# Altium PCB ui_board.PcbDoc
Units mm, origin at the board's own origin, x right, y up, seen from the top; angles counter-clockwise.
Board outline 50 x 49.98 mm, 2 copper layers (Top Layer, Bottom Layer), stack 1.671 mm thick; 44 components, 42 nets, 155 pads, 77 vias.
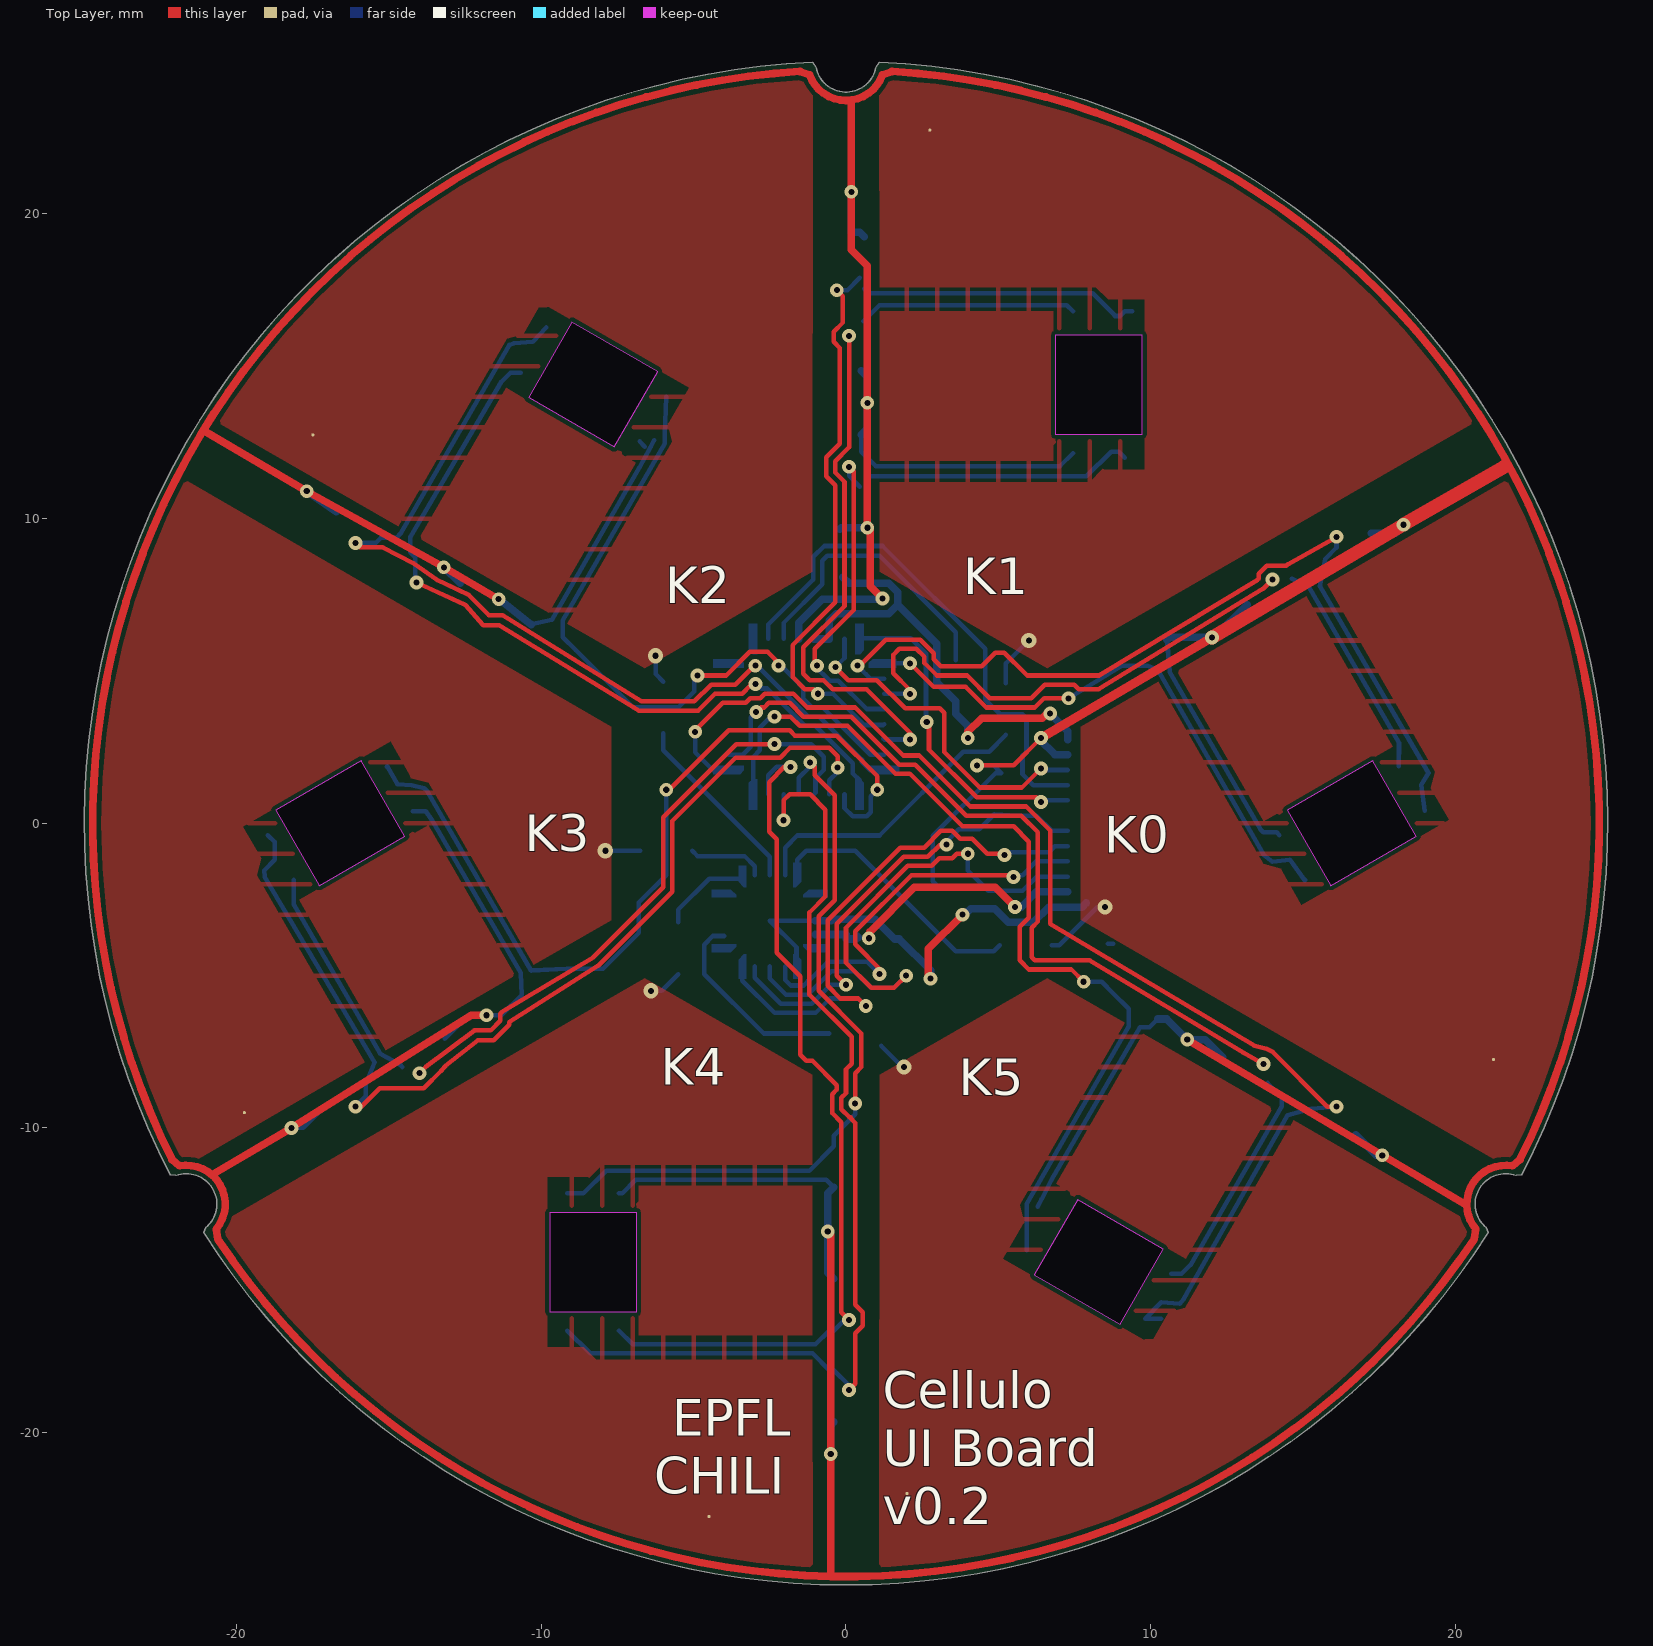
[diagram p0: Top Layer view]
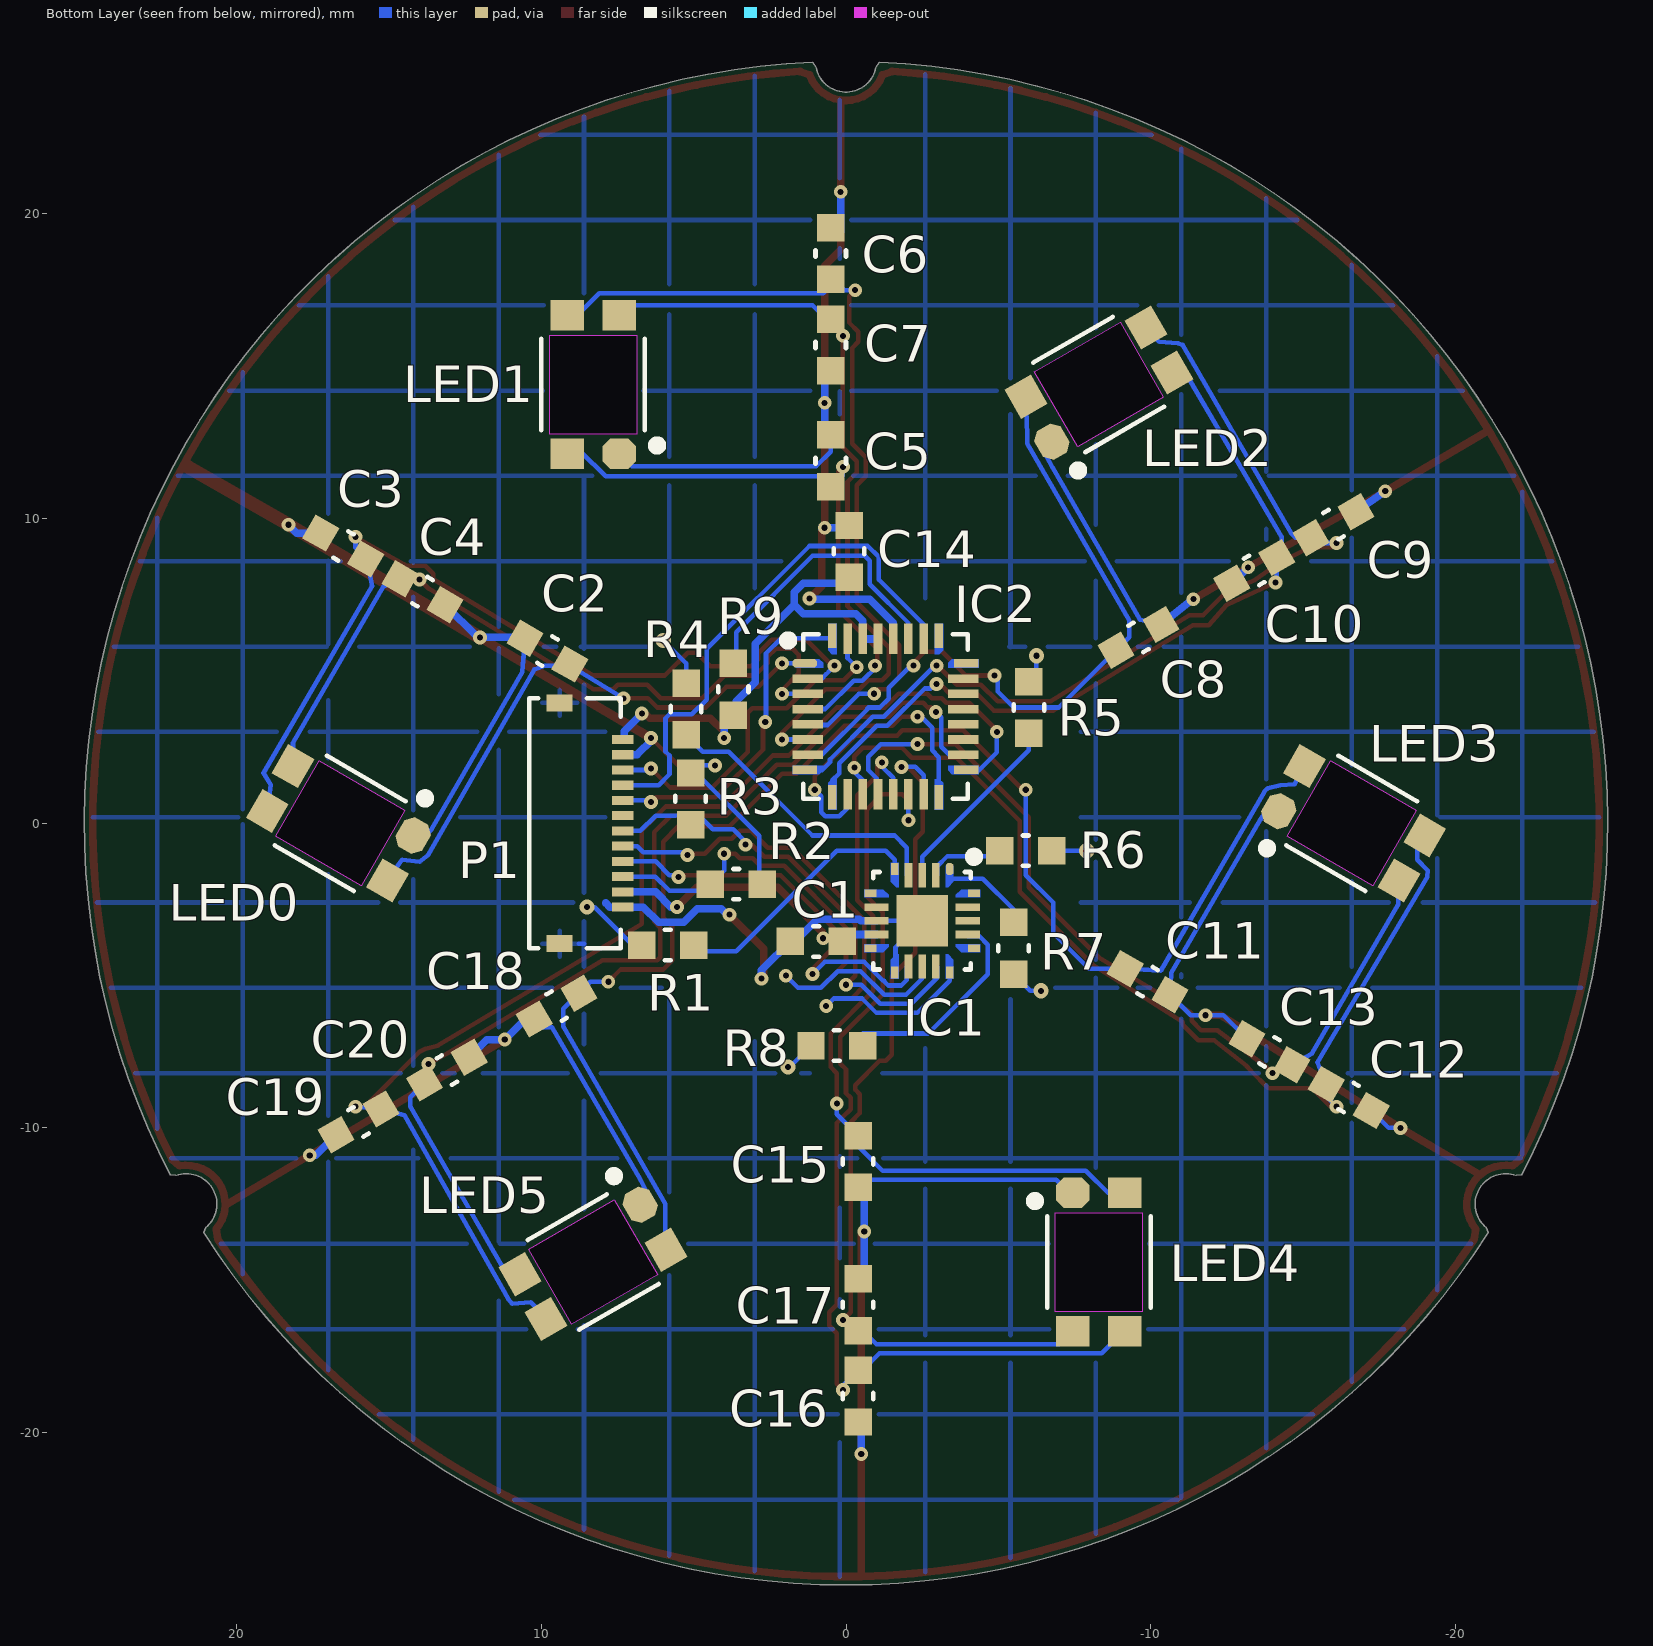
[diagram p1: Bottom Layer view, seen from below]

## Layer stack, top to bottom
Top Layer: signal copper 0.0356
Dielectric: core 1.6, FR-4, Dk 4.8
Bottom Layer: signal copper 0.0356

## Board outline
-21.085,-13.432 -21.008,-13.266 ccw(c-21.651,-12.5) -21.993,-11.56 -22.175,-11.544 cw(c0,0) -1.09,24.976 -0.985,24.826 ccw(c0,25) 0.985,24.826 1.09,24.976 cw(c0,0) 22.175,-11.544 21.993,-11.56 ccw(c21.651,-12.5) 21.008,-13.266 21.085,-13.432 cw(c0,0)

## Design rules (kind name [scope] priority, off if disabled: settings)
Clearance [All] p1: gap=0.15
ComponentClearance [All] p1: gap=0.15 collisioncheckmode=3 verticalgap=0.254 showdistances=FALSE
HoleSize [All] p1: absolutevalues=TRUE maxlimit=99 minlimit=0.2 maxpercent=80.000 minpercent=20.000
HoleToHoleClearance [All] p1: gap=0.15 allowstackedmicrovias=TRUE
MinimumSolderMaskSliver [All] p1: minsoldermaskwidth=0.1
PlaneClearance [All] p1: clearance=0.15
PolygonConnect KeyPadConnect [(InNet('NetK0_1') OR InNet('NetK1_1') OR InNet('NetK2_1') OR InNet('NetK3_1') OR InNet('NetK4_1') OR InNet('NetK5_1'))] p1: connectstyle=Direct reliefconductorwidth=0.254 reliefentries=4 polygonreliefangle="90 Angle" airgapwidth=0.254
PolygonConnect ShieldConnect [InNet('AGND')] p2: connectstyle=Relief reliefconductorwidth=0.15 reliefentries=4 polygonreliefangle="90 Angle" airgapwidth=0.15
PolygonConnect [All] p3: connectstyle=Relief reliefconductorwidth=0.254 reliefentries=4 polygonreliefangle="90 Angle" airgapwidth=0.254
RoutingVias [All] p1: holewidth=0.5 width=0.65 viastyle="Through Hole" minholewidth=0.3 minwidth=0.4 maxholewidth=3 maxwidth=4
ShortCircuit BokCircuit [InComponent('IC1') OR InComponent('IC2')] p1: allowed=TRUE
ShortCircuit [All] p2: allowed=FALSE
SilkToSilkClearance [All] p1: silktosilkclearance=0
SilkToSolderMaskClearance [IsPad] p1: minsilkscreentomaskgap=0.15 clearancetoexposedcopper=TRUE
SolderMaskExpansion [All] p1: expansion=0.102
Width [All] p1: maxlimit=99 minlimit=0.15 preferedwidth=0.15 minimp=50.000000 maximp=50.000000 favimp=50.000000
20 further rules are at their usual default settings.

## Classes and differential pairs
component class Input: C1 IC1 K0 K1 K2 K3 K4 K5 P1 R1 R2 R3 R4 R5 R6 R7 R8
component class Visual: C2 C3 C4 C5 C6 C7 C8 C9 C10 C11 C12 C13 C14 C15 C16 C17 C18 C19 C20 IC2 LED0 LED1 LED2 LED3 LED4 LED5 R9

## Components (designator, comment, footprint, x,y, rotation, side; value= is the part's Value field where it differs from the comment)
C1 "0.1uF" 1608[0603]_M 0.975,-3.875 r180 bottom
C2 "10nF" 1608[0603]_M 9.8,5.65 r30 bottom
C3 "10nF" 1608[0603]_M 16.5,9.1 r30 bottom
C4 "10nF" 1608[0603]_M 13.9,7.6 r210 bottom
C5 "10nF" 1608[0603]_M 0.5,11.9 r90 bottom
C6 "10nF" 1608[0603]_M 0.5,18.7 r90 bottom
C7 "10nF" 1608[0603]_M 0.5,15.7 r270 bottom
C8 "10nF" 1608[0603]_M -9.6,6.1 r150 bottom
C9 "10nF" 1608[0603]_M -16,9.8 r150 bottom
C10 "10nF" 1608[0603]_M -13.4,8.3 r330 bottom
C11 "10nF" 1608[0603]_M -9.9,-5.2 r210 bottom
C12 "10nF" 1608[0603]_M -16.5,-9 r210 bottom
C13 "10nF" 1608[0603]_M -13.9,-7.5 r30 bottom
C14 "0.1uF" 1608[0603]_M -0.1,8.925 r90 bottom
C15 "10nF" 1608[0603]_M -0.4,-11.1 r270 bottom
C16 "10nF" 1608[0603]_M -0.4,-18.8 r270 bottom
C17 "10nF" 1608[0603]_M -0.4,-15.8 r90 bottom
C18 "10nF" 1608[0603]_M 9.5,-6 r330 bottom
C19 "10nF" 1608[0603]_M 16,-9.8 r330 bottom
C20 "10nF" 1608[0603]_M 13.1,-8.1 r150 bottom
IC1 "AT42QT1070-MMH" VQFN-20-EXPOSED-PAD_M -2.5,-3.2 r90 bottom
IC2 "TLC5947" VQFN-32_M -1.3,3.5 r0 bottom
K0 "SELF-CAP-TOUCH-SENSOR-PAD" TOUCH_SENSOR_SEED 21.25,-7.75 r90 top
K1 "SELF-CAP-TOUCH-SENSOR-PAD" TOUCH_SENSOR_SEED 2.75,22.75 r0 top
K2 "SELF-CAP-TOUCH-SENSOR-PAD" TOUCH_SENSOR_SEED -17.5,12.75 r90 top
K3 "SELF-CAP-TOUCH-SENSOR-PAD" TOUCH_SENSOR_SEED -19.75,-9.5 r90 top
K4 "SELF-CAP-TOUCH-SENSOR-PAD" TOUCH_SENSOR_SEED -4.5,-22.75 r90 top
K5 "SELF-CAP-TOUCH-SENSOR-PAD" TOUCH_SENSOR_SEED 2,-22 r90 top
LED0 "ASMB-MTB0-0A3A2 reverse mount as through hole" PLCC4-REVERSE-MOUNT_N 16.6,0 r210 bottom
LED1 "ASMB-MTB0-0A3A2 reverse mount as through hole" PLCC4-REVERSE-MOUNT_N 8.3,14.4 r270 bottom
LED2 "ASMB-MTB0-0A3A2 reverse mount as through hole" PLCC4-REVERSE-MOUNT_N -8.3,14.4 r330 bottom
LED3 "ASMB-MTB0-0A3A2 reverse mount as through hole" PLCC4-REVERSE-MOUNT_N -16.6,0 r30 bottom
LED4 "ASMB-MTB0-0A3A2 reverse mount as through hole" PLCC4-REVERSE-MOUNT_N -8.3,-14.4 r90 bottom
LED5 "ASMB-MTB0-0A3A2 reverse mount as through hole" PLCC4-REVERSE-MOUNT_N 8.3,-14.4 r150 bottom
P1 "Connector 12" FH33-12S-0.5SH_N 8,0 r270 bottom
R1 "4K7" 1608[0603]_M 5.85,-4 r180 bottom
R2 "47K" 1608[0603]_M 3.6,-2 r180 bottom
R3 "47K" 1608[0603]_M 5.1,0.8 r90 bottom
R4 "4K7" 1608[0603]_M 5.25,3.75 r270 bottom
R5 "4K7" 1608[0603]_M -6,3.8 r270 bottom
R6 "4K7" 1608[0603]_M -5.9,-0.9 r0 bottom
R7 "4K7" 1608[0603]_M -5.5,-4.1 r90 bottom
R8 "4K7" 1608[0603]_M 0.3,-7.3 r180 bottom
R9 "4K99" 1608[0603]_M 3.7,4.4 r90 bottom

## Footprints (in the part's own frame and the unit in brackets; to place one, negate y for a bottom-side part, rotate by r counter-clockwise, add the part's x,y. Pads: shape width x height; smd on the part's side, far side on the other; paste and mask are expansions set on the pad)
1608[0603]_M [mm] "Two Terminal Package, Body 1.6x0.8mm, IPC Low Density"
  rect 0.9x0.9 smd: 1(-0.85,0) 2(0.85,0)
  silkscreen extent -0.1,-0.5 0.1,0.5, body extent -0.8,-0.4 0.8,0.4, height 0.85
FH33-12S-0.5SH_N [mm] "Flax flexible cable connector, 12-Leads, 0.5mm Pitch, Side entry, IPC medium density"
  rect 0.3x0.7 smd paste-0.025 mask+0.049: 1(-2.75,0.675) 2(-2.25,0.675) 3(-1.75,0.675) 4(-1.25,0.675) 5(-0.75,0.675) 6(-0.25,0.675) 7(0.25,0.675) 8(0.75,0.675) 9(1.25,0.675) 10(1.75,0.675) 11(2.25,0.675) 12(2.75,0.675)
  rect 0.55x0.85 smd: Mechanical1(-3.95,-1.4) Mechanical2(3.95,-1.4)
  silkscreen extent -4.1,-2.4 4.1,0.6, body extent -4.08,-2.35 4.07,0.5, height 1.3
PLCC4-REVERSE-MOUNT_N [mm] "PLCC reverse mount, 4-Leads, Body 3.2x2.8mm, 1.7mm pitch, Lead Span 5.4mm, IPC Medium Density"
  oct 1x1.1 smd: 1(2.275,0.85)
  rect 1x1.1 smd: 2(-2.275,0.85) 3(-2.275,-0.85) 4(2.275,-0.85)
  Keep-Out Layer board cut-out: -1.625,-1.425 -1.625,1.425 1.625,1.425 1.625,-1.425
  Keep-Out Layer region: -1.625,-1.425 -1.625,1.425 1.625,1.425 1.625,-1.425
  silkscreen extent -1.5,-1.7 2.15,2.25, body extent -2.7,-1.4 2.7,1.4, height 1.1
TOUCH_SENSOR_SEED [mm] "Self-capacitive touch sensor pad seed"
  round 0.1 smd paste-0.05 mask-0.05: 1(0,0)
VQFN-20-EXPOSED-PAD_M [mm] "VQFN, 20-Leads, Body 3x3mm, Pitch 0.45mm, IPC Low Density"
  oct 0.4x0.25 smd paste-0.025 mask+0.05: 1(1.7,-0.9)
  rect 0.8x0.25 smd paste-0.025 mask+0.05: 2(1.5,-0.45) 3(1.5,0) 4(1.5,0.45) 12(-1.5,0.45) 13(-1.5,0) 14(-1.5,-0.45)
  rect 0.4x0.25 smd paste-0.85 mask+0.05: 5(1.7,0.9) 11(-1.7,0.9) 15(-1.7,-0.9)
  rect 0.25x0.4 smd paste-0.85 mask+0.05: 6(0.9,1.7) 10(-0.9,1.7) 16(-0.9,-1.7) 20(0.9,-1.7)
  rect 0.25x0.8 smd paste-0.025 mask+0.05: 7(0.45,1.5) 8(0,1.5) 9(-0.45,1.5) 17(-0.45,-1.5) 18(0,-1.5) 19(0.45,-1.5)
  rect 1.7x1.7 smd mask+0.05: EP(0,0)
  Top Layer region: -1.9,-0.775 -1.1,-0.775 -1.1,-0.85 -1.275,-1.025 -1.9,-1.025
  Top Layer region: -0.775,-1.9 -0.775,-1.1 -0.85,-1.1 -1.025,-1.275 -1.025,-1.9
  Top Layer region: 1.8,-0.775 1.1,-0.775 1.1,-0.85 1.275,-1.025 1.8,-1.025
  Top Layer region: 0.775,-1.9 0.775,-1.1 0.85,-1.1 1.025,-1.275 1.025,-1.9
  Top Layer region: 0.775,1.9 0.775,1.1 0.85,1.1 1.025,1.275 1.025,1.9
  Top Layer region: 1.9,0.775 1.1,0.775 1.1,0.85 1.275,1.025 1.9,1.025
  Top Layer region: -1.9,0.775 -1.1,0.775 -1.1,0.85 -1.275,1.025 -1.9,1.025
  Top Layer region: -0.775,1.9 -0.775,1.1 -0.85,1.1 -1.025,1.275 -1.025,1.9
  silkscreen extent -1.6,-1.85 2.25,1.6, body extent -1.55,-1.55 1.55,1.55, height 0.85
VQFN-32_M [mm] "VQFN, 32-Leads, Body 5x5mm, Pitch 0.5mm, IPC Low Density"
  oct 0.8x0.28 smd paste-0.025 mask+0.05: 1(2.65,-1.75)
  rect 1x0.28 smd paste-0.025 mask+0.05: 2(2.55,-1.25) 3(2.55,-0.75) 4(2.55,-0.25) 5(2.55,0.25) 6(2.55,0.75) 7(2.55,1.25) 18(-2.55,1.25) 19(-2.55,0.75) 20(-2.55,0.25) 21(-2.55,-0.25) 22(-2.55,-0.75) 23(-2.55,-1.25)
  rect 0.8x0.28 smd paste-0.4 mask+0.05: 8(2.65,1.75) 17(-2.65,1.75) 24(-2.65,-1.75)
  rect 0.28x0.8 smd paste-0.4 mask+0.05: 9(1.75,2.65) 16(-1.75,2.65) 25(-1.75,-2.65) 32(1.75,-2.65)
  rect 0.28x1 smd paste-0.025 mask+0.05: 10(1.25,2.55) 11(0.75,2.55) 12(0.25,2.55) 13(-0.25,2.55) 14(-0.75,2.55) 15(-1.25,2.55) 26(-1.25,-2.55) 27(-0.75,-2.55) 28(-0.25,-2.55) 29(0.25,-2.55) 30(0.75,-2.55) 31(1.25,-2.55)
  Top Layer region: -1.61,-3.05 -1.61,-2.05 -1.765,-2.05 -1.89,-2.175 -1.89,-3.05
  Top Layer region: -3.05,-1.61 -2.05,-1.61 -2.05,-1.765 -2.175,-1.89 -3.05,-1.89
  Top Layer region: 1.61,-3.05 1.61,-2.05 1.765,-2.05 1.89,-2.175 1.89,-3.05
  Top Layer region: 2.95,-1.61 2.05,-1.61 2.05,-1.765 2.175,-1.89 2.95,-1.89
  Top Layer region: 3.05,1.61 2.05,1.61 2.05,1.765 2.175,1.89 3.05,1.89
  Top Layer region: 1.61,3.05 1.61,2.05 1.765,2.05 1.89,2.175 1.89,3.05
  Top Layer region: -1.61,3.05 -1.61,2.05 -1.765,2.05 -1.89,2.175 -1.89,3.05
  Top Layer region: -3.05,1.61 -2.05,1.61 -2.05,1.765 -2.175,1.89 -3.05,1.89
  silkscreen extent -2.7,-2.7 3.35,2.7, body extent -2.58,-2.58 2.58,2.58, height 1

## Part data
C1 C2 C3 C4 C5 C6 C7 C8 C9 C10 C11 C12 C13 C14 C15 C16 C17 C18 C19 C20: library part Capacitor, "Generic Capacitor"
IC1: library part AT42QT1070, "Seven-channel capacitive touch sensor (Comms mode)"
IC2: "24-Channel, 12-Bit PWM LED Driver With Internal Oscillator"
K0 K1 K2 K3 K4 K5: "Generic self-capacitance touch sensor pad"
LED0 LED1 LED2 LED3 LED4 LED5: library part RGB-LED-COMMON-ANODE, "Generic RGB LED with common anode"
P1: "Connector 12-Pin"
R1 R2 R3 R4 R5 R6 R7 R8 R9: library part Resistor, "Generic Resistor"

## Via types
v1: diameter 0.45, hole 0.2, Top Layer to Bottom Layer, 46 vias
v2: diameter 0.45, hole 0.2, Top Layer to Bottom Layer, tented both sides, 14 vias
v3: diameter 0.45, hole 0.2, Top Layer to Bottom Layer, tented bottom, 10 vias
v4: diameter 0.5, hole 0.2, Top Layer to Bottom Layer, tented both sides, 6 vias
v5: diameter 0.45, hole 0.2, Top Layer to Bottom Layer, tented top, 1 vias

## Nets (pads, with @x,y where several pads share a name; then routed paths per layer and width w, separated by ;. In a path a pad name is that pad's centre, name@x,y a point inside that pad or via, vN(x,y) a via of type N, cw(c..) or ccw(c..) an arc to the next point about the centre after c; other vN are vias at no path point)
3V3: C2.2 C3.2 C4.2 C5.2 C6.2 C7.2 C8.2 C9.2 C10.2 C11.2 C12.2 C13.2 C14.2 C15.2 C16.2 C17.2 C18.2 C19.2 C20.2 IC2.28 LED0.1 LED1.1 LED2.1 LED3.1 LED4.1 LED5.1 P1.2 R2.2 R3.2 | length 319.1
  Top Layer w0.15: v1(4.3,1.9) 5.5,1.9 v1(6.4,2.8)
  Top Layer w0.25: -22.127,-11.032 -21.872,-11.244 cw(c-21.651,-12.5) -20.674,-13.32 -20.618,-13.647 ; -21.086,12.892 v3(-17.7,10.9) v3(-13.2,8.4) v3(-11.4,7.358) ; -20.809,-11.534 v3(-18.2,-10) -12.3,-6.3 v3(-11.8,-6.3) ; -1.509,24.679 -1.198,24.564 ccw(c0,25) 1.198,24.564 1.509,24.679 ; v1(-0.6,-13.4) -0.5,-13.5 v3(-0.5,-20.7) -0.5,-24.727 ; 0.175,23.7 0.175,18.825 0.7,18.3 v1(0.7,9.7) 0.8,9.7 0.8,7.775 v1(1.2,7.375) ; v1(11.2,-7.1) 17.605,-10.892 20.376,-12.532 ; 20.674,-13.32 cw(c21.651,-12.5) 20.376,-12.532 ; 22.127,-11.032 21.872,-11.244 ccw(c21.651,-12.5) 20.376,-12.532
  Top Layer w0.254: -22.127,-11.032 cw(c0,0) -1.509,24.679 ; -20.618,-13.647 ccw(c0,0) -0.5,-24.72 ccw(c0,0) 20.618,-13.647 20.674,-13.32 ; 1.509,24.679 cw(c0,0) 22.127,-11.032
  Top Layer w0.3: v1(6.4,2.8) v1(12.01,6.1)
  Top Layer w0.45: v1(12.01,6.1) v1(18.3,9.8) 21.6,11.7
  Bottom Layer w0.15: v3(-18.2,-10) -17.811,-10 C12.2 ; LED3.1@-14.226,0.389 -13.789,0.389 -13.6,0.125 -10.675,-4.925 C11.2 -11.311,-6.3 v3(-11.8,-6.3) -12.389,-6.3 C13.2 ; C8.2 -9.65,6.675 -6.771,11.679 -6.417,12.347 LED2.1@-6.297,12.572 ; LED4.1@-7.45,-12.15 -7.35,-12.15 -6.9,-11.7 -0.65,-11.7 C15.2 ; LED2.1@-6.776,12.539 LED2.1@-6.6,12.362 ; C5.2 0.5,12.2 0.975,11.725 7.025,11.725 LED1.1@7.45,12.15 ; R2.2@2.95,-2 2.85,-1.9 2.85,-0.414 4.914,1.65 R3.2 4.85,1.9 v1(4.3,1.9) ; LED5.1@6.287,-12.587 6.412,-12.347 6.75,-11.702 9.65,-6.7 9.961,-6.7 C18.2 ; C2.2@10.536,6.025 10.625,4.975 13.6,-0.2 13.7,-0.3 14.138,-0.3 LED0.1@14.226,-0.389
  Bottom Layer w0.25: v3(-17.7,10.9) C9.2 ; v3(-13.2,8.4) C10.2 ; v3@-11.3,7.3 C8.2 ; IC2.28 -1.55,6.579 -0.779,7.35 1.175,7.35 v1(1.2,7.375) ; v3(-0.5,-20.7) -0.5,-19.75 C16.2 ; C17.2 -0.6,-14.75 v1(-0.6,-13.4) -0.6,-12.15 C15.2 ; C14.2@-0.2,9.65 -0.15,9.7 0.8,9.7 v1(0.7,9.7) ; v1(0.175,20.725) 0.175,19.4 0.45,19.4 C6.2@0.6,19.25 ; C5.2 0.7,12.95 v1(0.7,13.8) 0.7,14.65 C7.2 ; v1@6.35,2.761 6.861,2.25 P1.2@7.275,2.25 ; C18.2 10.525,-6.425 v1(11.2,-7.1) 11.789,-7.1 C20.2 ; C2.2@10.536,6.025 10.611,6.1 v1(12.01,6.1) 12.089,6.1 C4.2 ; C19.2 17.411,-10.9 v1(17.6,-10.9) ; C3.2 18.025,9.525 v1(18.3,9.8)
A3V3: C1.2 IC1.9 P1.11 | length 9.1
  Top Layer w0.25: v1(0.75,-3.775) v1@0.775,-3.775 ; v1@0.775,-3.575 0.775,-3.569 2.244,-2.1 4.9,-2.1 v1(5.55,-2.75)
  Bottom Layer w0.25: IC1.9 C1.2@0,-3.65 ; C1.2@0.015,-3.8 C1.2@0.325,-3.8 ; C1.2@0.35,-3.7 C1.2@0.4,-3.75 ; v1(0.75,-3.775) v1@0.775,-3.775 ; v1@5.45,-2.75 5.75,-2.75 6.25,-2.25 P1.11@7.275,-2.25
AGND: C1.1 IC1.8 IC1.11 IC1.EP P1.12 P1.Mechanical1 P1.Mechanical2 | length 15.7
  Top Layer w0.25: v1(2.775,-5.1) 2.7,-5.025 2.7,-4.125 v1(3.825,-3)
  Bottom Layer w0.15: IC1.11 -1.625,-4.875 -1.625,-4.075 IC1.EP IC1.8 ; 8.6,-3.95 8.775,-3.95
  Bottom Layer w0.25: IC1.8 -0.489,-3.2 -0.439,-3.15 0.95,-3.15 1.6,-3.8 1.75,-3.8 2.775,-4.825 v1(2.775,-5.1) ; v1@3.825,-3.075 4.1,-2.8 4.875,-2.8 5.325,-3.25 6.15,-3.25 6.65,-2.75 P1.12@7.275,-2.75 ; P1.12 7.755,-2.75 7.89,-2.615
GND: C14.1 IC2.29 IC2.30 P1.1 R9.1 | length 15.5
  Top Layer w0.25: v1(4,2.8) 4,3 4.453,3.453 4.455,3.45 6.446,3.45 v1@6.648,3.652
  Bottom Layer w0.25: IC2.29 IC2.30 -0.55,6.65 -0.325,6.875 1.407,6.875 1.7,7.168 ; C14.1 0.1,7.875 1.407,7.875 1.7,7.582 1.7,7.168 ; v1(4,2.8) 4,3.2 3.6,3.6 3.6,4 2.975,4.625 2.975,5.893 1.7,7.168 ; v1(6.7,3.6) 7.275,3.025 P1.1@7.275,2.75
LED1_BLUE: C4.1 IC2.3 LED0.2 | length 24.3
  Top Layer w0.15: v1(2.1,4.25) 2.1,4.375 1.55,4.925 1.55,5.525 1.75,5.725 2.311,5.725 2.575,5.462 2.575,5.261 2.986,4.85 3.974,4.85 4.724,4.1 6.076,4.1 6.526,4.55 7.486,4.55 7.636,4.4 8.3,4.4 13.7,7.7 v1(14,8)
  Bottom Layer w0.15: IC2.3 v1(2.1,4.25) ; C4.1 15.175,7.775 18.15,2.65 LED0.2
LED1_GREEN: C3.1 IC2.2 LED0.3 | length 29.7
  Top Layer w0.15: v2(0.375,5.175) 0.45,5.175 1.3,6.025 2.436,6.025 2.875,5.586 2.875,5.386 3.111,5.15 4.45,5.15 4.9,5.6 5.2,5.6 5.9,4.9 5.95,4.85 8.304,4.85 13.506,7.99 ; 13.55,8.028 13.55,8.186 13.814,8.45 14.45,8.45 14.5,8.5 v1(16.1,9.4)
  Bottom Layer w0.15: v2(0.375,5.175) 0.525,5.025 0.525,5.017 0.657,4.885 0.665,4.885 0.8,4.75 IC2.2 ; v1(16.1,9.4) 16.1,9.05 15.725,8.675 15.55,7.775 18.495,2.717 19.125,1.65 18.875,1.25 LED0.3@18.994,0.41
LED1_RED: C2.1 IC2.1 LED0.4 | length 18.7
  Top Layer w0.15: v1(2.1,5.25) 2.875,4.475 3.925,4.475 4.6,3.8 6.2,3.8 6.5,4.1 v1(7.3,4.1)
  Bottom Layer w0.15: IC2.1 v1(2.1,5.25) ; v1(7.3,4.1) 9.064,5.175 9.897,5.175 10.23,5.05 13.725,-1.05 13.995,-1.263 14.571,-1.196 LED0.4@15.046,-1.861 ; LED0.4 LED0.4@15.046,-1.861 ; LED0.4@15.076,-1.861 LED0.4@15.046,-1.861
LED2_BLUE: C7.1 IC2.6 LED1.2 | length 24.5
  Top Layer w0.15: v1(0.1,16) 0.1,12.336 -0.35,11.886 -0.35,11.514 -0.05,11.214 -0.05,7.126 -1.4,5.776 -1.4,4.914 -1.186,4.7 -1.112,4.7 -0.739,4.7 -0.439,4.4 0.675,4.4 2.1,2.975 v1(2.1,2.75)
  Bottom Layer w0.15: C7.1@0.575,16.475 1.1,17 7.25,17 LED1.2@7.45,16.8 ; IC2.6@1.225,2.775 IC2.6 v1(2.1,2.75)
LED2_GREEN: C6.1 IC2.5 LED1.3 | length 27.7
  Top Layer w0.15: v2(-0.925,4.25) -1.075,4.4 -1.35,4.4 -1.75,4.8 -1.75,5.85 -0.35,7.25 -0.35,11.089 -0.65,11.389 -0.65,12.011 -0.2,12.461 -0.2,15.6 -0.4,15.8 -0.4,16.136 -0.1,16.436 -0.1,17.3 v1(-0.3,17.5)
  Bottom Layer w0.15: v2(-0.925,4.25) -0.425,4.25 0.6,3.225 1.225,3.225 IC2.5 ; v1(-0.3,17.5) 0.05,17.5 C6.1@0.45,17.9 ; C6.1@0.6,17.55 0.75,17.4 8.1,17.4 LED1.3@8.825,16.675 ; LED1.3@8.818,16.65 9,16.65 9.15,16.8 LED1.3@9.4,16.8
LED2_RED: C5.1 IC2.4 LED1.4 | length 19.8
  Top Layer w0.15: v2@-1.025,5.15 -1.025,5.726 0.25,7.001 0.25,11.55 v1(0.1,11.7)
  Bottom Layer w0.15: v2@-1.025,5.175 -1,5.15 -0.97,5.181 -0.956,5.181 v2(-0.95,5.175) ; v2@-1.025,5.222 -1.025,5.164 -0.536,4.675 -0.25,4.675 0.675,3.75 IC2.4 ; v1@0.1,11.8 v1(0.1,11.7) 0.1,11.4 C5.1@0.45,11.05 ; C5.1@0.788,11.387 7.887,11.387 8.7,12.2 8.95,12.2 LED1.4@9.15,12
LED3_BLUE: C10.1 IC2.9 LED2.2 | length 26.4
  Top Layer w0.15: v3(-14.1,7.9) -12.5,7.175 -11.9,6.5 -11.395,6.505 ; -11.395,6.504 -6.8,3.7 -4.85,3.7 -4.3,4.25 -3.411,4.25 -3.136,4.525 v2@-3.025,4.525
  Bottom Layer w0.15: v3(-14.1,7.9) -14.136,7.936 C10.1 -14.3,8.889 -14.3,9.4 -11.3,14.5 -11.011,14.789 LED2.2@-10.674,14.789 ; v2(-2.972,4.575) -2.925,4.575 -2.775,4.425 -2.585,4.425 -1.36,3.2 -1.007,3.2 0.225,1.968 0.225,1.633 0.45,1.408 IC2.9
LED3_GREEN: C9.1 IC2.8 LED2.3 | length 31.1
  Top Layer w0.15: v3(-16.1,9.2) -15.954,9.054 -15.2,9.054 -14.188,8.529 -13.418,7.982 -12.389,7.5 -11.723,6.834 -11.279,6.834 -6.7,4 -4.975,4 -4.425,4.55 -3.634,4.55 -3.009,5.175 v2(-2.975,5.175)
  Bottom Layer w0.15: v3(-16.1,9.2) -15.439,9.2 C9.1 -14.753,9.375 -14.628,9.5 -11.05,15.7 -10.9,15.753 -10.275,15.8 LED2.3 ; v2(-2.975,5.175) -2.91,5.175 -1.236,3.5 -0.883,3.5 0.525,2.093 0.525,2 0.775,1.75 IC2.8
LED3_RED: C8.1 IC2.7 LED2.4 | length 23.1
  Top Layer w0.15: v1(-4.875,4.85) -3.936,4.85 -3.161,5.625 -2.575,5.625 -2.125,5.175 v2(-2.214,5.175)
  Bottom Layer w0.15: LED2.4 -5.947,12.75 -5.947,12.475 -9.304,6.654 -9.3,6.111 C8.1 -6.989,3.8 -5.5,3.8 -4.975,4.325 -4.975,4.75 v1(-4.875,4.85) ; v2(-2.214,5.175) -2.125,5.175 -1.4,4.45 -1.4,4.089 -1.111,3.8 -0.739,3.8 -0.707,3.768 -0.707,3.749 0.792,2.25 IC2.7
LED4_BLUE: C13.1 IC2.12 LED3.2 | length 27.7
  Top Layer w0.15: v3(-14,-8.2) -13.8,-8 -12.2,-6.8 -11.664,-6.8 -11.35,-6.486 -11.35,-6.25 -11.3,-6.2 -8.3,-4.4 -6,-2.1 -6,0.2 -3.6,2.6 v2(-2.35,2.6)
  Bottom Layer w0.15: LED3.2@-18.124,-1.861 -18.124,-2.676 -15.298,-7.55 C13.1 C13.1@-14.561,-8 ; v2(-2.35,2.6) -1.139,2.6 -0.725,2.186 -0.725,1.814 -0.725,1.75 -1,1.475 -1,1 IC2.12
LED4_GREEN: C12.1 IC2.11 LED3.3 | length 33.6
  Top Layer w0.15: v3(-16.1,-9.3) -15.909,-9.3 -15.309,-8.7 -13.864,-8.7 -13.277,-8.113 -13.277,-8.1 -13.138,-7.962 -12.081,-7.119 -11.558,-7.119 -11.05,-6.611 -11.05,-6.528 -8.127,-4.673 -5.7,-2.247 -5.7,0.076 -3.626,2.15 -2.164,2.15 -1.839,2.475 -0.55,2.475 -0.275,2.2 v2(-0.275,1.825)
  Bottom Layer w0.15: LED3.3@-18.974,-0.389 -18.75,-0.612 -18.75,-1.2 -19.1,-1.55 -19.078,-1.75 -15.476,-7.85 C12.1 -15.764,-8.964 v3(-16.1,-9.3) ; IC2.11 -0.55,1.408 -0.275,1.683 v2(-0.275,1.825)
LED4_RED: C11.1 IC2.10 LED3.4 | length 28.8
  Top Layer w0.15: v1(-5.9,1.1) -5.8,1.1 -3.85,3.05 -1.851,3.05 -1.676,2.875 -0.3,2.875 1.025,1.55 v2(1.025,1.1)
  Bottom Layer w0.15: LED3.4@-15.076,1.861 LED3.4@-15.048,1.861 ; LED3.4 LED3.4@-15.048,1.861 ; v1@-5.9,1.125 v1(-5.9,1.1) -5.9,-1.7 -6.8,-2.6 -6.8,-3.6 -7.975,-4.775 C11.1 -10.332,-4.831 -13.734,1.041 -13.846,1.154 -14.25,1.25 -14.725,1.275 LED3.4@-15.048,1.861 ; IC2.10 -0.05,0.492 0.217,0.225 0.683,0.225 0.815,0.357 0.815,0.89 v2(1.025,1.1)
LED5_BLUE: C17.1 IC2.15 LED4.2 | length 29.5
  Top Layer w0.15: v2(-1.825,1.85) -2.025,1.85 -2.525,1.35 -2.525,-0.275 -2.275,-0.525 -2.275,-4.25 -1.5,-5.025 -1.5,-7.6 -1.3,-7.8 -1.1,-7.8 -0.3,-8.6 -0.3,-8.739 -0.45,-8.889 -0.45,-9.511 -0.15,-9.811 -0.15,-16.05 v1(0.1,-16.3)
  Bottom Layer w0.15: LED4.2@-7.45,-16.65 -7,-17.1 -1,-17.1 -0.55,-16.65 C17.1 v1@0.1,-16.15 ; IC2.15 -2.55,1.575 -2.275,1.85 v2(-1.825,1.85)
LED5_GREEN: C16.1 IC2.14 LED4.3 | length 33.8
  Top Layer w0.15: v1(-2.05,0.1) -2.05,0.75 -1.85,0.95 -1.175,0.95 -0.675,0.45 -0.675,-2.403 -1.2,-2.928 -1.2,-5.624 0.188,-7.012 0.188,-7.888 0,-8.076 0,-8.864 -0.15,-9.014 -0.15,-9.386 0.114,-9.65 0.15,-9.65 0.15,-9.686 0.3,-9.836 0.3,-15.8 0.55,-16.05 0.55,-16.486 0.3,-16.736 0.3,-18.4 v1(0.1,-18.6)
  Bottom Layer w0.15: LED4.3@-9.15,-16.65 -8.4,-17.4 -1.1,-17.4 -0.55,-17.95 C16.1 0.1,-18.45 v1(0.1,-18.6) ; v1(-2.05,0.1) IC2.14
LED5_RED: C15.1 IC2.13 LED4.4 | length 24.7
  Top Layer w0.15: v2(-1.175,2) -1.025,1.85 -1.025,1.575 -0.375,0.925 -0.375,-2.527 -0.9,-3.052 -0.9,-5.5 0.5,-6.9 0.5,-8 0.3,-8.2 v1(0.3,-9.2)
  Bottom Layer w0.15: LED4.4@-9.15,-12.15 -8.625,-12.15 -7.875,-11.4 -1.2,-11.4 -0.4,-10.6 C15.1 0.3,-9.55 v1(0.3,-9.2) ; IC2.13 -1.55,1.489 -1.175,1.864 v2(-1.175,2)
LED6_BLUE: C20.1 IC2.18 LED5.2 | length 33.5
  Top Layer w0.15: v2@-2.875,3.725 -2.8,3.8 -2.687,3.8 -2.537,3.95 -1.849,3.95 -1.399,3.5 0.174,3.5 1.749,1.925 2.275,1.925 3.95,0.25 5.75,0.25 6.3,-0.3 6.3,-3.224 6.1,-3.424 6.1,-4.4 6.2,-4.5 8,-4.5 13.044,-7.526 v1(13.7,-7.9)
  Bottom Layer w0.15: IC2.18 -3.392,2.25 -3.125,2.517 -3.125,3.475 v2(-2.95,3.65) ; LED5.2@10.674,-14.789 11.011,-14.789 11.3,-14.5 14.3,-9.3 14.3,-8.989 C20.1
LED6_GREEN: C19.1 IC2.17 LED5.3 | length 40.9
  Top Layer w0.15: v1@-4.95,3.05 -4.05,3.95 -3.287,3.95 -3.137,4.1 -2.811,4.1 -2.661,4.25 -1.724,4.25 -1.274,3.8 0.298,3.8 1.874,2.225 2.4,2.225 4.075,0.55 5.914,0.55 6.7,-0.236 6.7,-3.3 13.4,-7.3 13.8,-7.4 14,-7.5 15.8,-9.3 v1(16.1,-9.3)
  Bottom Layer w0.15: v1(-4.95,3) -4.95,2.325 -4.375,1.75 IC2.17 ; LED5.3@10.339,-16.261 9.824,-16.261 9.828,-16.257 10.35,-15.725 10.95,-15.775 11.082,-15.618 14.491,-9.59 C19.1 v1(16.1,-9.3)
LED6_RED: C18.1 IC2.16 LED5.4 | length 30.6
  Top Layer w0.15: v2(-2.35,3.5) -1.823,3.5 ; v1(7.8,-5.2) 7.4,-4.8 6,-4.8 5.7,-4.5 5.7,-3.4 6,-3.1 6,-0.6 5.5,-0.1 3.824,-0.1 2.099,1.625 1.625,1.625 0.05,3.2 -1.523,3.2 ; -1.823,3.5 -1.523,3.2 ; -1.823,3.5 -1.523,3.2
  Bottom Layer w0.15: IC2.16 -3.05,2.168 -2.825,2.393 -2.825,3.139 -2.514,3.45 v2@-2.3,3.45 ; LED5.4@5.926,-14.011 5.926,-12.499 9.275,-6.675 9.275,-6.087 C18.1 8.389,-5.2 v1(7.8,-5.2)
NetIC1_1: IC1.1 R7.2 | length 2.8
  Bottom Layer w0.15: R7.2 -5.5,-2.832 -4.493,-1.825 -3.525,-1.825 -3.5,-1.8
NetIC1_2: IC1.2 R6.2 | length 2.6
  Bottom Layer w0.15: R6.2 -4.875,-1.075 -3.332,-1.075 -3,-1.407 IC1.2@-3,-1.7
NetIC1_3: IC1.3 R5.2 | length 6.1
  Bottom Layer w0.15: R5.2 -6,2.4 -2.5,-1.1 IC1.3
NetIC1_4: IC1.4 R4.2 | length 9.7
  Bottom Layer w0.15: IC1.4@-2,-1.7 -2,-0.8 -1.6,-0.4 1.1,-0.4 3.85,2.35 4.7,2.35 R4.2
NetIC1_5: IC1.5 R1.2 | length 8.5
  Bottom Layer w0.15: IC1.5 -1.6,-1.2 -1.3,-0.9 0.3,-0.9 3.6,-4.2 4.85,-4.2 R1.2@5.05,-4
NetIC1_17: IC1.17 R8.2 | length 6.6
  Bottom Layer w0.15: IC1.17@-4,-3.7 -4.368,-3.7 -4.65,-3.982 -4.65,-4.95 -2.7,-6.9 R8.2@-0.55,-6.9
NetIC2_26: IC2.26 P1.4 | length 17.3
  Bottom Layer w0.15: IC2.26 -2.55,6.525 -1.075,8 -1.075,8.742 -0.717,9.1 1.199,9.1 4.575,5.724 4.575,4.057 5.057,3.575 5.793,3.575 5.925,3.443 5.925,2.357 5.793,2.225 5.793,1.607 6.15,1.25 P1.4@7.275,1.25
NetIC2_27: IC2.27 R9.2 | length 9.5
  Bottom Layer w0.15: IC2.27 -2.05,6.574 -0.775,7.849 -0.775,8.618 -0.618,8.775 1.1,8.775 3.6,6.275 R9.2@3.6,5.35
NetIC2_31: IC2.31 P1.3 | length 11.3
  Top Layer w0.15: v2(-0.35,5.125) 0.075,4.7 1.013,4.7 1.939,3.775 3.075,3.775 3.225,3.625 3.225,2.339 4.389,1.175 5.775,1.175 v1(6.4,1.8)
  Bottom Layer w0.15: v2(-0.35,5.125) -0.05,5.425 IC2.31 ; v1(6.4,1.8) 6.45,1.75 P1.3@7.275,1.75
NetIC2_32: IC2.32 P1.5 | length 10.8
  Top Layer w0.15: v1(2.65,3.325) 2.725,3.25 2.725,2.414 4.289,0.85 6.25,0.85 v1(6.4,0.7)
  Bottom Layer w0.15: IC2.32@0.525,6.075 2.125,6.075 2.625,5.575 2.625,3.35 v1(2.65,3.325) ; v1(6.4,0.7) 6.45,0.75 P1.5@7.275,0.75
NetK0_1: K0.1 R1.1 | length 2.3
  Bottom Layer w0.15: R1.1@6.75,-4 7,-4 8.25,-2.75 v4(8.5,-2.75)
NetK1_1: K1.1 R4.1 | length 1.7
  Bottom Layer w0.15: R4.1 5.25,5.25 v4(6,6)
NetK2_1: K2.1 R5.1 | length 1
  Bottom Layer w0.15: v4(-6.25,5.5) -6.25,4.9 R5.1
NetK3_1: K3.1 R6.1 | length 1.1
  Bottom Layer w0.15: v4(-7.9,-0.9) R6.1
NetK4_1: K4.1 R7.1 | length 1.1
  Bottom Layer w0.15: v4(-6.4,-5.5) -6.05,-5.5 R7.1
NetK5_1: K5.1 R8.1 | length 1
  Bottom Layer w0.15: R8.1 1.85,-8 v4(1.9,-8)
SCL: IC1.15 P1.8 | length 18.2
  Top Layer w0.15: v1(0.65,-6) 0.4,-5.75 0.189,-5.75 0.188,-5.751 -0.185,-5.751 -0.6,-5.336 -0.6,-3.176 1.776,-0.8 2.564,-0.8 3.114,-0.25 3.486,-0.25 3.75,-0.514 4.15,-0.514 4.636,-1 v5@5.2,-1
  Bottom Layer w0.15: IC1.15 -3.4,-5.168 -2.343,-6.225 -1,-6.225 -0.525,-5.75 -0.186,-5.75 -0.185,-5.751 0.188,-5.751 0.189,-5.75 0.4,-5.75 v1(0.65,-6) ; v5@5.2,-1 5.25,-0.95 6.65,-0.95 6.85,-0.75 P1.8@7.275,-0.75
  other v5: 5.201,-1.04
SDA: IC1.12 P1.9 | length 14
  Top Layer w0.15: v1(1.1,-4.95) 1.125,-4.975 1.125,-4.8 0.3,-3.975 0.3,-3.549 2.149,-1.7 5.5,-1.7 v1(5.5,-1.763)
  Bottom Layer w0.15: IC1.12@-2,-4.7 -2,-5.143 -1.818,-5.325 -1.382,-5.325 -1.25,-5.193 -1.25,-5.175 -1.225,-5.175 -0.601,-4.551 0.701,-4.551 v1(1.1,-4.95) ; v1(5.5,-1.763) 5.5,-1.7 5.8,-1.7 6.25,-1.25 P1.9@7.275,-1.25
TOUCH_C\H\A\N\G\E\: IC1.14 P1.7 R3.1 | length 15.5
  Top Layer w0.15: v1(0.001,-5.301) -0.3,-5 -0.3,-3.301 1.901,-1.1 2.688,-1.1 3.088,-0.7 v1(3.3,-0.7) v1@3.3,-0.6
  Bottom Layer w0.15: IC1.14@-3,-4.7 -3,-5.068 -2.143,-5.925 -1.124,-5.925 -0.5,-5.301 v1(0.001,-5.301) ; v1(3.3,-0.7) 3.3,-0.6 3.7,-0.2 4.368,-0.2 4.868,0.3 5.123,0.283 5.6,0.25 6.25,0.25 6.75,-0.25 P1.7@7.275,-0.25
TOUCH_R\E\S\E\T\: IC1.13 P1.10 R2.1 | length 18.7
  Top Layer w0.15: v1(1.975,-5) 1.575,-5.4 0.825,-5.4 0,-4.575 0,-3.425 2.025,-1.4 2.812,-1.4 3.062,-1.15 3.486,-1.15 3.636,-1 v1(4,-1)
  Bottom Layer w0.15: IC1.13 -2.5,-5.093 -1.968,-5.625 -1.25,-5.625 -0.476,-4.851 0.276,-4.851 0.825,-5.4 1.575,-5.4 v1(1.975,-5) ; v1(4,-1) 4,-1.55 R2.1 4.663,-2.213 5.793,-2.213 6.255,-1.75 P1.10@7.275,-1.75
pads on no net: IC1.6 IC1.7 IC1.10 IC1.16 IC1.18 IC1.19 IC1.20 IC2.19 IC2.20 IC2.21 IC2.22 IC2.23 IC2.24 IC2.25 P1.6

## Polygon pours and split planes (outlines as drawn)
NetK0_1 on Top Layer "K0" (solid, pour order 44): 7.701,3.176 10.249,4.647 13.699,-1.328 14.382,-1.511 14.296,-1.561 14.946,-2.687 15.899,-2.137 14.549,0.201 14.139,0.311 13.706,0.061 10.856,4.997 15.099,7.447 17.949,2.511 17.343,2.161 18.843,-0.437 19.796,0.113 19.196,1.152 19.342,1.699 15.792,7.847 22.175,11.544 cw(c0,0) 22.175,-11.544 7.7,-3.173
NetK3_1 on Top Layer "K3" (solid, pour order 43): -7.701,-3.176 -10.249,-4.647 -13.699,1.328 -14.382,1.511 -14.296,1.561 -14.946,2.687 -15.899,2.137 -14.549,-0.201 -14.139,-0.311 -13.706,-0.061 -10.856,-4.997 -15.099,-7.447 -17.949,-2.511 -17.343,-2.161 -18.843,0.437 -19.796,-0.113 -19.196,-1.152 -19.342,-1.699 -15.792,-7.847 -22.175,-11.544 cw(c0,0) -22.175,11.544 -7.7,3.173
NetK2_1 on Top Layer "K2" (solid, pour order 42): -6.601,5.081 -9.149,6.553 -5.699,12.528 -5.882,13.211 -5.796,13.161 -5.146,14.287 -6.099,14.837 -7.449,12.499 -7.339,12.089 -6.906,11.839 -9.756,6.903 -13.999,9.353 -11.149,14.289 -10.543,13.939 -9.043,16.537 -9.996,17.087 -10.596,16.048 -11.142,15.901 -14.692,9.753 -21.085,13.432 cw(c0,0) -1.09,24.976 -1.102,8.255
NetK5_1 on Top Layer "K5" (solid, pour order 41): 6.601,-5.081 9.149,-6.553 5.699,-12.528 5.882,-13.211 5.796,-13.161 5.146,-14.287 6.099,-14.837 7.449,-12.499 7.339,-12.089 6.906,-11.839 9.756,-6.903 13.999,-9.353 11.149,-14.289 10.543,-13.939 9.043,-16.537 9.996,-17.087 10.596,-16.048 11.142,-15.901 14.692,-9.753 21.085,-13.432 cw(c0,0) 1.09,-24.976 1.102,-8.255
NetK4_1 on Top Layer "K4" (solid, pour order 40): -1.1,-8.257 -1.1,-11.2 -8,-11.2 -8.5,-11.7 -8.5,-11.6 -9.8,-11.6 -9.8,-12.7 -7.1,-12.7 -6.8,-12.4 -6.8,-11.9 -1.1,-11.9 -1.1,-16.8 -6.8,-16.8 -6.8,-16.1 -9.8,-16.1 -9.8,-17.2 -8.6,-17.2 -8.2,-17.6 -1.1,-17.6 -1.09,-24.976 cw(c0,0) -21.085,-13.432 -6.598,-5.082
NetK1_1 on Top Layer "K1" (solid, pour order 39): 1.1,8.257 1.1,11.2 8,11.2 8.5,11.7 8.5,11.6 9.8,11.6 9.8,12.7 7.1,12.7 6.8,12.4 6.8,11.9 1.1,11.9 1.1,16.8 6.8,16.8 6.8,16.1 9.8,16.1 9.8,17.2 8.6,17.2 8.2,17.6 1.1,17.6 1.09,24.976 cw(c0,0) 21.085,13.432 6.598,5.082
NetK0_1 on Top Layer "K0_HATCH1" (hatched Horizontal grid 1 track 0.15, pour order 38): 10.287,4.582 10.893,4.932 13.706,0.061 14.139,0.311 14.549,0.201 15.899,-2.137 14.946,-2.687 14.296,-1.561 14.382,-1.511 13.699,-1.328
NetK3_1 on Top Layer "K3_HATCH1" (hatched Horizontal grid 1 track 0.15, pour order 37): -10.287,-4.582 -10.893,-4.932 -13.706,-0.061 -14.139,-0.311 -14.549,-0.201 -15.899,2.137 -14.946,2.687 -14.296,1.561 -14.382,1.511 -13.699,1.328
NetK2_1 on Top Layer "K2_HATCH1" (hatched Horizontal grid 1 track 0.15, pour order 36): -9.112,6.618 -9.718,6.968 -6.906,11.839 -7.339,12.089 -7.449,12.499 -6.099,14.837 -5.146,14.287 -5.796,13.161 -5.882,13.211 -5.699,12.528
NetK5_1 on Top Layer "K5_HATCH1" (hatched Horizontal grid 1 track 0.15, pour order 35): 9.112,-6.618 9.718,-6.968 6.906,-11.839 7.339,-12.089 7.449,-12.499 6.099,-14.837 5.146,-14.287 5.796,-13.161 5.882,-13.211 5.699,-12.528
NetK4_1 on Top Layer "K4_HATCH1" (hatched Vertical grid 1 track 0.15, pour order 34): -1.175,-11.2 -1.175,-11.9 -6.8,-11.9 -6.8,-12.4 -7.1,-12.7 -9.8,-12.7 -9.8,-11.6 -8.5,-11.6 -8.5,-11.7 -8,-11.2
NetK1_1 on Top Layer "K1_HATCH1" (hatched Vertical grid 1 track 0.15, pour order 33): 1.175,11.2 1.175,11.9 6.8,11.9 6.8,12.4 7.1,12.7 9.8,12.7 9.8,11.6 8.5,11.6 8.5,11.7 8,11.2
NetK0_1 on Top Layer "K0_HATCH2" (hatched Horizontal grid 1 track 0.15, pour order 32): 15.137,7.382 15.83,7.782 19.342,1.699 19.196,1.152 19.796,0.113 18.843,-0.437 17.343,2.161 17.949,2.511
NetK3_1 on Top Layer "K3_HATCH2" (hatched Horizontal grid 1 track 0.15, pour order 31): -15.137,-7.382 -15.83,-7.782 -19.342,-1.699 -19.196,-1.152 -19.796,-0.113 -18.843,0.437 -17.343,-2.161 -17.949,-2.511
NetK2_1 on Top Layer "K2_HATCH2" (hatched Horizontal grid 1 track 0.15, pour order 30): -13.962,9.418 -14.655,9.818 -11.142,15.901 -10.596,16.048 -9.996,17.087 -9.043,16.537 -10.543,13.939 -11.149,14.289
NetK5_1 on Top Layer "K5_HATCH2" (hatched Horizontal grid 1 track 0.15, pour order 29): 13.962,-9.418 14.655,-9.818 11.142,-15.901 10.596,-16.048 9.996,-17.087 9.043,-16.537 10.543,-13.939 11.149,-14.289
NetK4_1 on Top Layer "K4_HATCH2" (hatched Vertical grid 1 track 0.15, pour order 28): -1.175,-16.8 -1.175,-17.6 -8.2,-17.6 -8.6,-17.2 -9.8,-17.2 -9.8,-16.1 -6.8,-16.1 -6.8,-16.8
NetK1_1 on Top Layer "K1_HATCH2" (hatched Vertical grid 1 track 0.15, pour order 27): 1.175,16.8 1.175,17.6 8.2,17.6 8.6,17.2 9.8,17.2 9.8,16.1 6.8,16.1 6.8,16.8
AGND on Bottom Layer "AGND" (hatched 90Degree grid 2.8 track 0.15, remove dead copper, pour order 2): -20.618,-13.647 -20.674,-13.32 ccw(c-21.651,-12.5) -21.872,-11.244 -22.127,-11.032 cw(c0,0) -1.509,24.679 -1.198,24.564 ccw(c0,25) 1.198,24.564 1.509,24.679 cw(c0,0) 22.127,-11.032 21.872,-11.244 ccw(c21.651,-12.5) 20.376,-12.532 ccw(c21.651,-12.5) 20.674,-13.32 20.618,-13.647 cw(c0,0) -0.5,-24.72 cw(c0,0)

## Other copper
Bottom Layer:
  pour cut-out: -7.698,4.447 -0.004,8.893 7.698,4.447 7.698,-4.447 -0.002,-8.89 -7.698,-4.447

## Silkscreen, mask and mechanical layers (free items; w line width, h text height)
Top Overlay:
  text "Cellulo" at 1.2,-19.2 h1.2
  text "EPFL" at -5.7,-20.1 h1.2
  text "UI Board" at 1.2,-21.1 h1.2
  text "CHILI" at -6.3,-22 h1.2
  text "v0.2" at 1.2,-23 h1.2
Mechanical 1:
  the board outline again, w0.1
Mechanical 32:
  lines w0.01: -22.127,-11.032 cw(c0,0) -1.509,24.679 -1.198,24.564 ccw(c0,25) 1.198,24.564 1.509,24.679 cw(c0,0) 22.127,-11.032 21.872,-11.244 ccw(c21.651,-12.5) 20.376,-12.532 ccw(c21.651,-12.5) 20.674,-13.32 20.618,-13.647 cw(c0,0) -0.5,-24.72 cw(c0,0) -20.618,-13.647 -20.674,-13.32 ccw(c-21.651,-12.5) -21.872,-11.244 -22.127,-11.032
  lines w0.1: 1.1,11.3 1.1,8.257 6.598,5.082 21.085,13.432 ccw(c0,0) 1.09,24.976 1.1,17.5 ; 1.1,11.3 1.1,11.9 ; 1.1,11.3 8,11.3 8.5,11.8 8.5,11.6 9.8,11.6 9.8,12.7 8.6,12.7 7.1,12.7 6.8,12.4 6.8,11.9 1.1,11.9 ; 1.1,11.9 1.1,16.8 ; 1.1,16.8 1.1,17.5 ; 1.1,16.8 6.8,16.8 6.8,16.1 9.8,16.1 9.8,17.2 8.5,17.2 8.2,17.5 1.1,17.5